# Altium PCB Buffer_PCB1.PcbDoc
Units mil, origin at the board's own origin, x right, y up, seen from the top; angles counter-clockwise.
Board outline 1300 x 900 mil, 2 copper layers (Top Layer, Bottom Layer); 6 components, 9 nets, 31 pads, 2 vias.
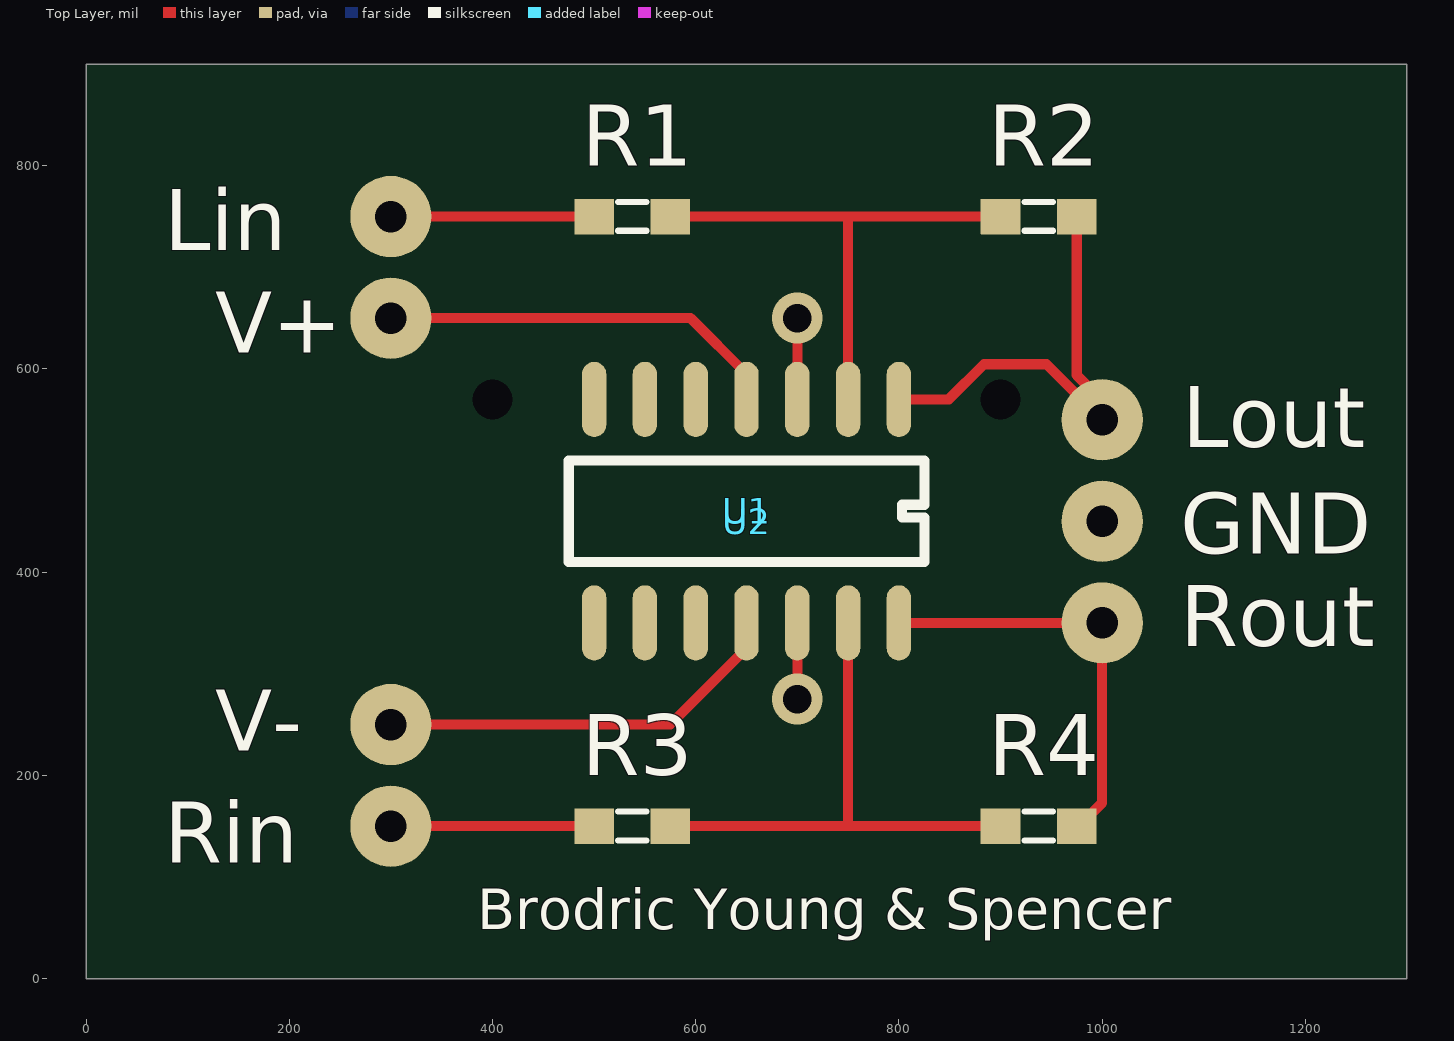
[diagram p0: Top Layer view]
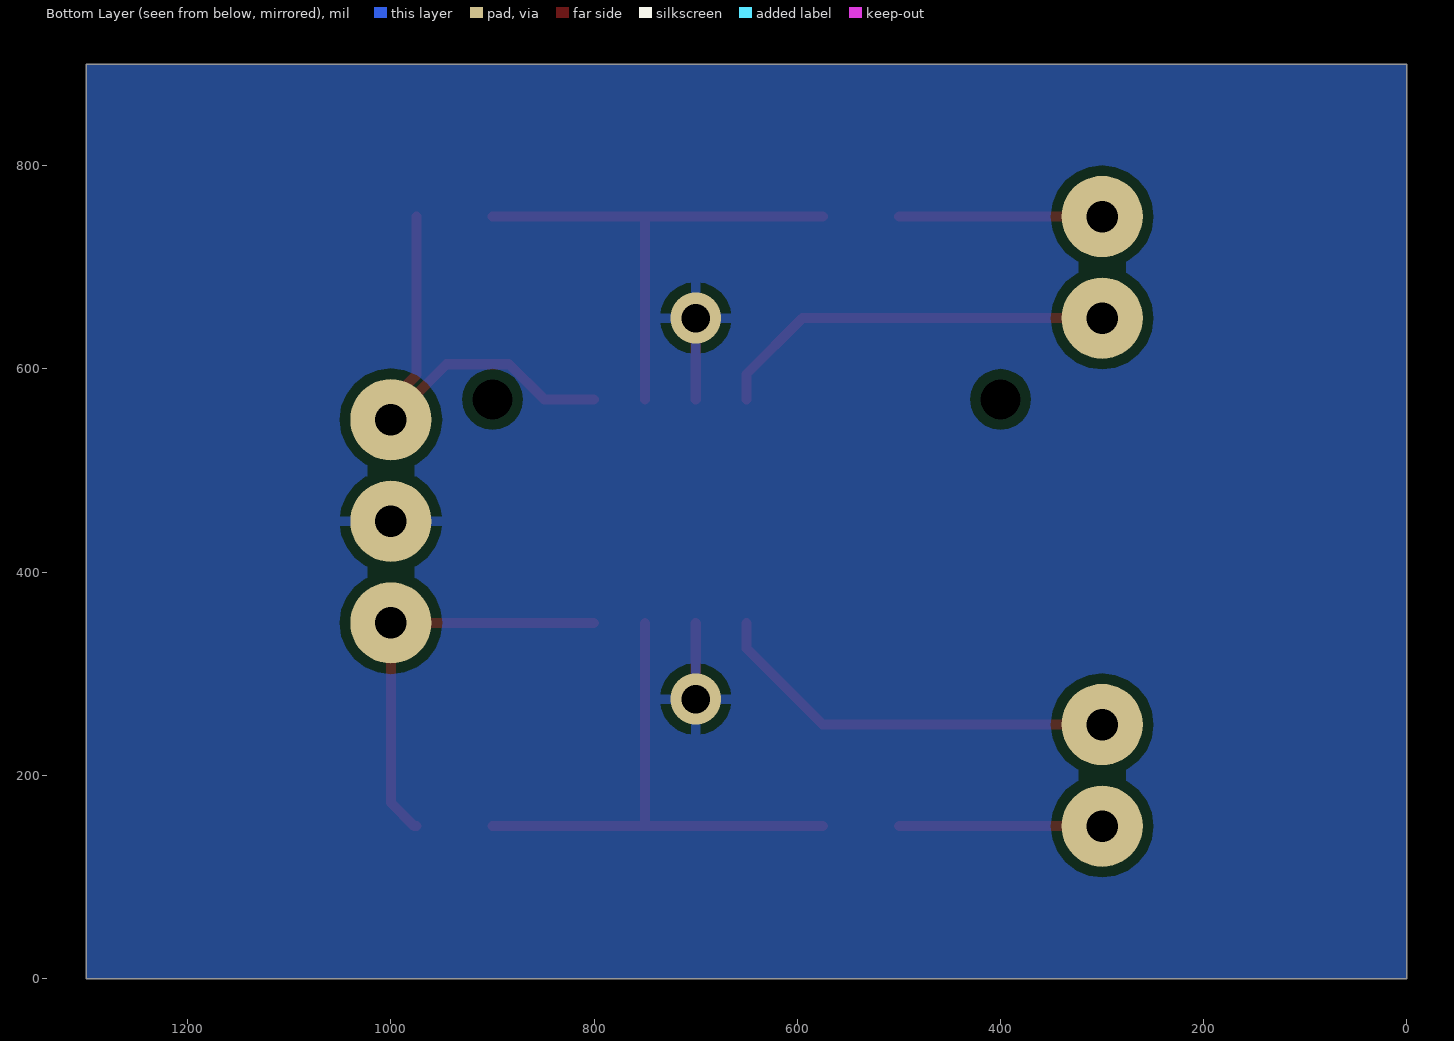
[diagram p1: Bottom Layer view, seen from below]

## Layer stack, top to bottom
Top Solder: solder mask 0.4, Solder Resist, Dk 3.5
Top Layer: signal copper 1.4
Dielectric 1: dielectric 12.6, FR-4, Dk 4.8
Bottom Layer: signal copper 1.4
Bottom Solder: solder mask 0.4, Solder Resist, Dk 3.5

## Board outline
0,0 0,900 1300,900 1300,0

## Design rules (kind name [scope] priority, off if disabled: settings)
AssemblyTestPointUsage [All] p1: isadvanced=TRUE
AssemblyTestpoint [All] p1: isadvanced=TRUE testpointundercomponent=TRUE minsize=40 maxsize=100 preferedsize=60 minholesize=0 maxholesize=40 preferedholesize=32 testpointgrid=1 usegrid=TRUE gridtolerance=0.01 allowsidetop=TRUE allowsidebottom=TRUE
Clearance [All] p1: gap=10 ignorepadtopadclearanceinfootprint=FALSE ismatrix=TRUE
ComponentClearance [All] p1: isadvanced=TRUE gap=10 collisioncheckmode=3 verticalgap=10 showdistances=FALSE
FabricationTestPointUsage [All] p1: isadvanced=TRUE valid=0 allowmultiple=FALSE
FabricationTestpoint [All] p1: isadvanced=TRUE side=3 testpointundercomponent=TRUE minsize=40 maxsize=100 preferedsize=60 minholesize=0 maxholesize=40 preferedholesize=32 testpointgrid=1 allowsidetop=TRUE allowsidebottom=TRUE usegrid=TRUE gridtolerance=0.01
FanoutControl Fanout_BGA [IsBGA] p1: isadvanced=TRUE bgadir=Out bgaviamode=Centered fanoutstyle=Auto fanoutdirection=Alternating viagrid=1 // Fanout_BGA (Default Rule)
FanoutControl Fanout_LCC [IsLCC] p2: isadvanced=TRUE bgadir=Out bgaviamode=Centered fanoutstyle=Auto fanoutdirection=Alternating viagrid=1 // Fanout_LCC (Default Rule)
FanoutControl Fanout_SOIC [IsSOIC] p3: isadvanced=TRUE bgadir=Out bgaviamode=Centered fanoutstyle=Auto fanoutdirection=Alternating viagrid=1 // Fanout_SOIC (Default Rule)
FanoutControl Fanout_Small [(CompPinCount < 5)] p4: isadvanced=TRUE bgadir=Out bgaviamode=Centered fanoutstyle=Auto fanoutdirection=OutThenIn viagrid=1 // Fanout_Small (Default Rule)
FanoutControl Fanout_Default [All] p5: isadvanced=TRUE bgadir=Out bgaviamode=Centered fanoutstyle=Auto fanoutdirection=Alternating viagrid=1 // Fanout_Default (Default Rule)
Height [All] p1: isadvanced=TRUE minheight=0 maxheight=1000 prefheight=500
HoleSize [All] p1: isadvanced=TRUE absolutevalues=TRUE maxlimit=100 minlimit=1 maxpercent=80.000 minpercent=20.000
HoleToHoleClearance [All] p1: isadvanced=TRUE gap=10 allowstackedmicrovias=TRUE
LayerPairs [All] p1: isadvanced=TRUE enforce=TRUE
MinimumSolderMaskSliver [All] p1: isadvanced=TRUE minsoldermaskwidth=10
NetAntennae [All] p1: isadvanced=TRUE netantennaetolerance=0
PasteMaskExpansion [All] p1: isadvanced=TRUE expansion=0
PlaneClearance [All] p1: isadvanced=TRUE clearance=20
PlaneConnect [All] p1: isadvanced=TRUE planeconnectstyle=Relief reliefexpansion=20 reliefentries=4 reliefconductorwidth=10 reliefairgap=10
PolygonConnect [All] p1: connectstyle=Relief reliefconductorwidth=10 reliefentries=4 polygonreliefangle="90 Angle" airgapwidth=10
RoutingCorners [All] p1: isadvanced=TRUE cornerstyle=45-Degree minsetback=100 maxsetback=100
RoutingPriority [All] p1: isadvanced=TRUE routingpriority=0
RoutingVias [All] p1: holewidth=28 width=50 viastyle="Through Hole" minholewidth=28 minwidth=50 maxholewidth=28 maxwidth=50
ShortCircuit [All] p1: isadvanced=TRUE allowed=FALSE
SilkToSilkClearance [All] p1: isadvanced=TRUE silktosilkclearance=10
SilkToSolderMaskClearance [IsPad] p1: isadvanced=TRUE minsilkscreentomaskgap=10 clearancetoexposedcopper=TRUE
SolderMaskExpansion [All] p1: isadvanced=TRUE expansion=4 istentingtop=FALSE
SupplyNets "Schematic Supply Nets_4" [InNet('GND')] p1: voltage=0.000
SupplyNets "Schematic Supply Nets_3" [InNet('Rin')] p2: voltage=0.000
SupplyNets "Schematic Supply Nets_2" [InNet('Lin')] p3: voltage=0.000
SupplyNets "Schematic Supply Nets_1" [InNet('V+')] p4: voltage=0.000
SupplyNets "Schematic Supply Nets" [InNet('V-')] p5: voltage=0.000
UnRoutedNet [All] p1: isadvanced=TRUE
UnpouredPolygon [All] p1: isadvanced=TRUE
Width [All] p1: maxlimit=10 minlimit=10 preferedwidth=10
4 further rules are at their usual default settings.

## Components (designator, comment, footprint, x,y, rotation, side; value= is the part's Value field where it differs from the comment)
R1 "KBS_Resistor" KBS_SMD0603 500,750 r0 top value=10k
R2 "KBS_Resistor" KBS_SMD0603 900,750 r0 top value=30k
R3 "KBS_Resistor" KBS_SMD0603 500,150 r0 top value=10k
R4 "KBS_Resistor" KBS_SMD0603 900,150 r0 top value=30k
U1 "LF347DR" KBS_SO14_w_Guide_Pin_Holes 650,460 r180 top
U2 "Header 7 Pin Buffer" KBS_7pin_Header_Buffer 1000,450 r0 top

## Footprints (in the part's own frame and the unit in brackets; to place one, negate y for a bottom-side part, rotate by r counter-clockwise, add the part's x,y. Pads: shape width x height; smd on the part's side, far side on the other; paste and mask are expansions set on the pad)
KBS_7pin_Header_Buffer [mil]
  round 80 hole 31 mask+2.5: 1(-700,300) 2(0,100) 3(-700,200) 4(0,0) 5(-700,-200) 6(0,-100) 7(-700,-300)
  body extent -740,-340 40,340, height 1
KBS_SMD0603 [mil]
  rrect1% 39x35 smd mask+2.5: 1(0,0) 2(75,0)
  silkscreen extent 24,-14 52,14, body extent -20,-18 93,17, height 1
KBS_SO14_w_Guide_Pin_Holes [mil]
  oval 24x74 smd paste+0 mask+2: 1(-150,-110) 2(-100,-110) 3(-50,-110) 4(0,-110) 5(50,-110) 6(100,-110) 7(150,-110) 8(150,110) 9(100,110) 10(50,110) 11(0,110) 12(-50,110) 13(-100,110) 14(-150,110)
  round 0 hole 39.37 unplated mask+0: MH_1(250,-110) MH_2(-250,-110)
  silkscreen extent -175,-50 175,50, body extent -187,-147 187,147, height 1

## Part data
R1 R2 R3 R4: library part CMP-009-00177-1, "Fixed Resistor, 0.25W, 10000ohm, 200V, Surface Mount, 1206", Case/Package=1206, Manufacturer=Yageo, Manufacturer Part Number=RC1206FR-0710KL, Max Operating Temperature=155°C, Min Operating Temperature=-55°C, Power=250mW, Tolerance=1%, Component Type=Resistors, Mounting Technology="Surface Mount", Pins=2, RoHS Compliant=Yes
U1: library part CMP-014-00002-1, "Operational Amplifier, 4 Func, 13000uV Offset-Max, JFET, PDSO14", Case/Package=SOP, Manufacturer="Texas Instruments", Max Operating Temperature=70°C, Min Operating Temperature=0°C, Nominal Supply Voltage=15V, Channels=4, Component Type=Amplifiers, Manufacturer Part Number=LF347DR, Pins=14, RoHS Compliant=Yes
U2: library part CMP-002-00071-2, "7 Pin Header for ECEN 299 buffer PCB.", Component Type=Connectors

## Via types
v1: diameter 50, hole 28, Top Layer to Bottom Layer, 2 vias

## Nets (pads, with @x,y where several pads share a name; then routed paths per layer and width w, separated by ;. In a path a pad name is that pad's centre, name@x,y a point inside that pad or via, vN(x,y) a via of type N, cw(c..) or ccw(c..) an arc to the next point about the centre after c; other vN are vias at no path point)
GND: U1.3 U1.12 U2.4 | length 155
  Top Layer w10: v1(700,275) U1.12 ; U1.3 v1(700,650)
Lin: R1.1 U2.1 | length 200
  Top Layer w10: U2.1 R1.1
Lout: R2.2 U1.1 U2.2 | length 447.4
  Top Layer w10: U1.1 849.08,570 883.76,604.69 945.31,604.69 U2.2 1000,568.94 975,593.94 R2.2
NetR1_2: R1.2 R2.1 U1.2 | length 505
  Top Layer w10: R1.2 750,750 ; U1.2 750,750 ; R2.1 750,750
NetR3_2: R3.2 R4.1 U1.13 | length 525
  Top Layer w10: R3.2 750,150 ; U1.13 750,150 ; R4.1 750,150
Rin: R3.1 U2.7 | length 200
  Top Layer w10: U2.7 R3.1
Rout: R4.2 U1.14 U2.6 | length 411.5
  Top Layer w10: U1.14 U2.6 1000,173 977,150 R4.2
V+: U1.4 U2.3 | length 397.8
  Top Layer w10: U2.3 595,650 650,595 U1.4
V-: U1.11 U2.5 | length 406.1
  Top Layer w10: U2.5 575,250 650,325 U1.11
pads on no net: U1.5 U1.6 U1.7 U1.8 U1.9 U1.10 U1.MH_1 U1.MH_2

## Polygon pours and split planes (outlines as drawn)
GND on Bottom Layer "GND_L02_P000" (solid, pour order 0): 0,0 0,900 1300,900 1300,0

## Silkscreen, mask and mechanical layers (free items; w line width, h text height)
Top Overlay:
  text "Brodric Young & Spencer" at 385,48.33 h40
Mechanical 1:
  the board outline again, w10

## Text inside footprints (layer, text, board x,y; h text height)
U2: Top Overlay "Lin" at 77,717 h60; Top Overlay "V+" at 126.98,616 h60; Top Overlay "V-" at 126.98,224 h60; Top Overlay "Rin" at 77,114 h60; Top Overlay "Lout" at 1079,523 h60; Top Overlay "GND" at 1077,418 h60; Top Overlay "Rout" at 1077,327 h60